# Altium PCB ESC_prototype_2.PcbDoc
Units mm, origin at the board's own origin, x right, y up, seen from the top; angles counter-clockwise.
Board outline 50 x 30 mm, 2 copper layers (Top Layer, Bottom Layer); 49 components, 41 nets, 160 pads, 60 vias.
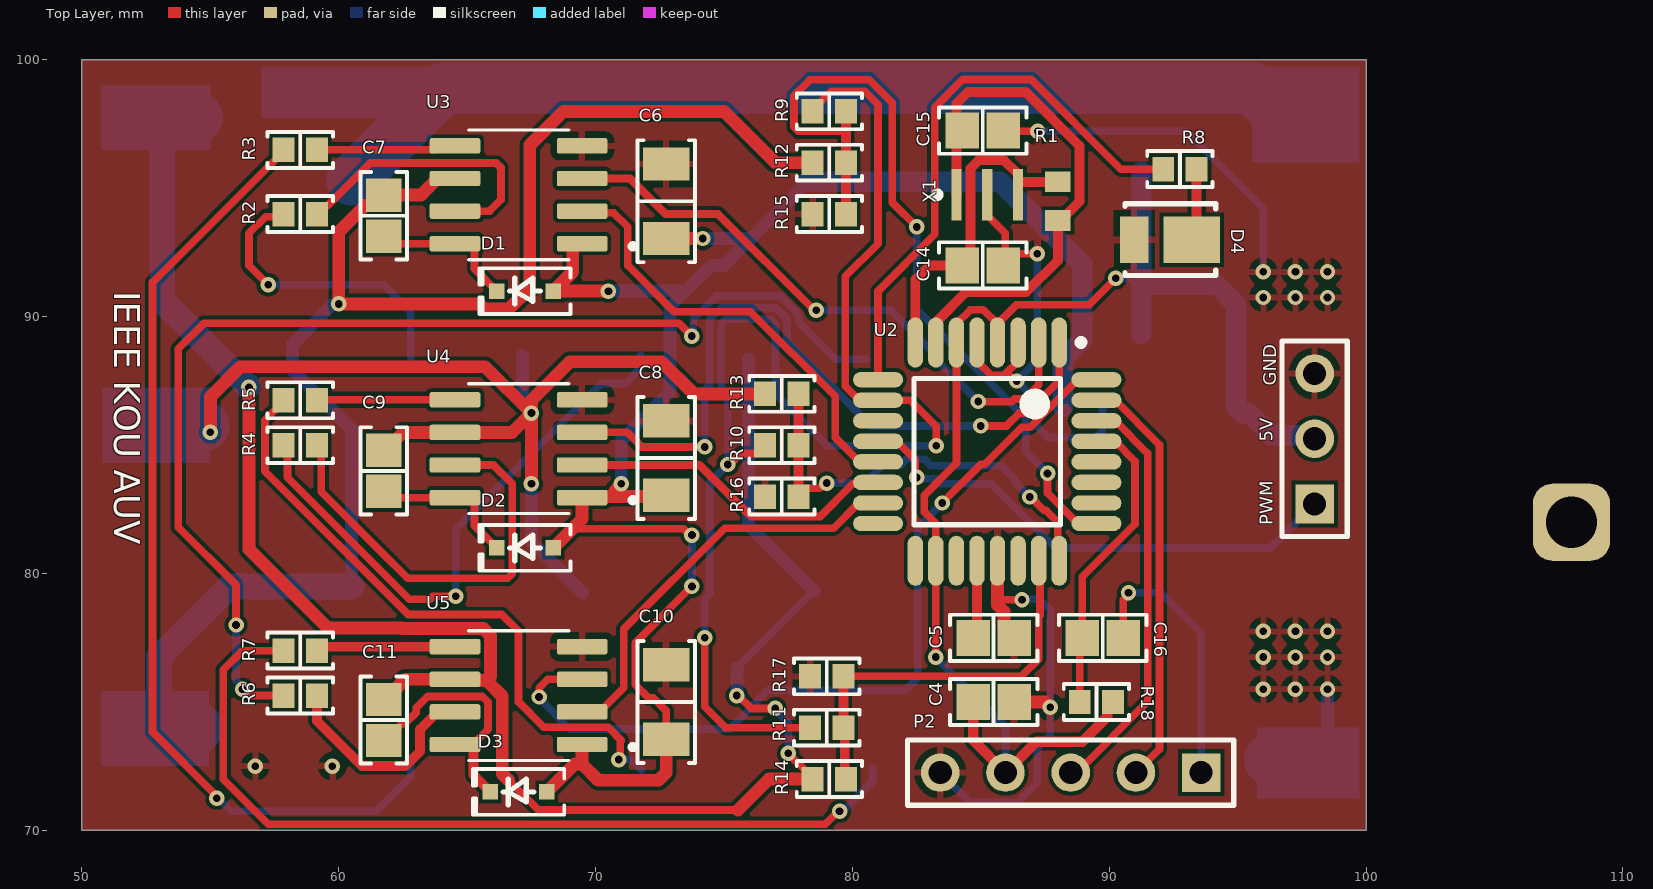
[diagram p0: Top Layer view]
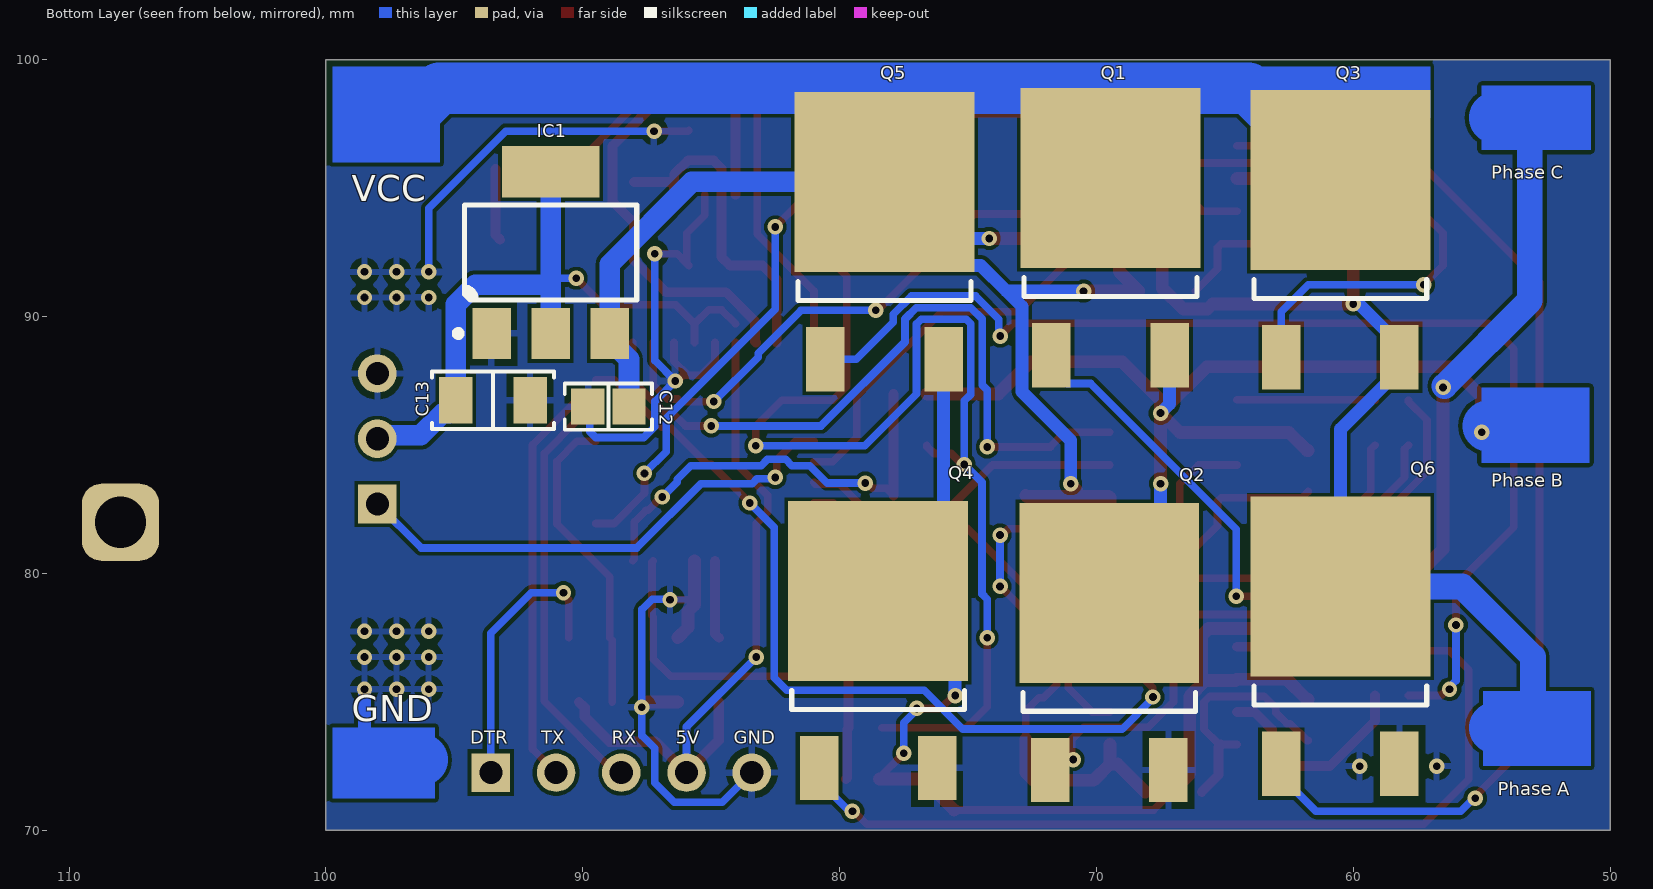
[diagram p1: Bottom Layer view, seen from below]
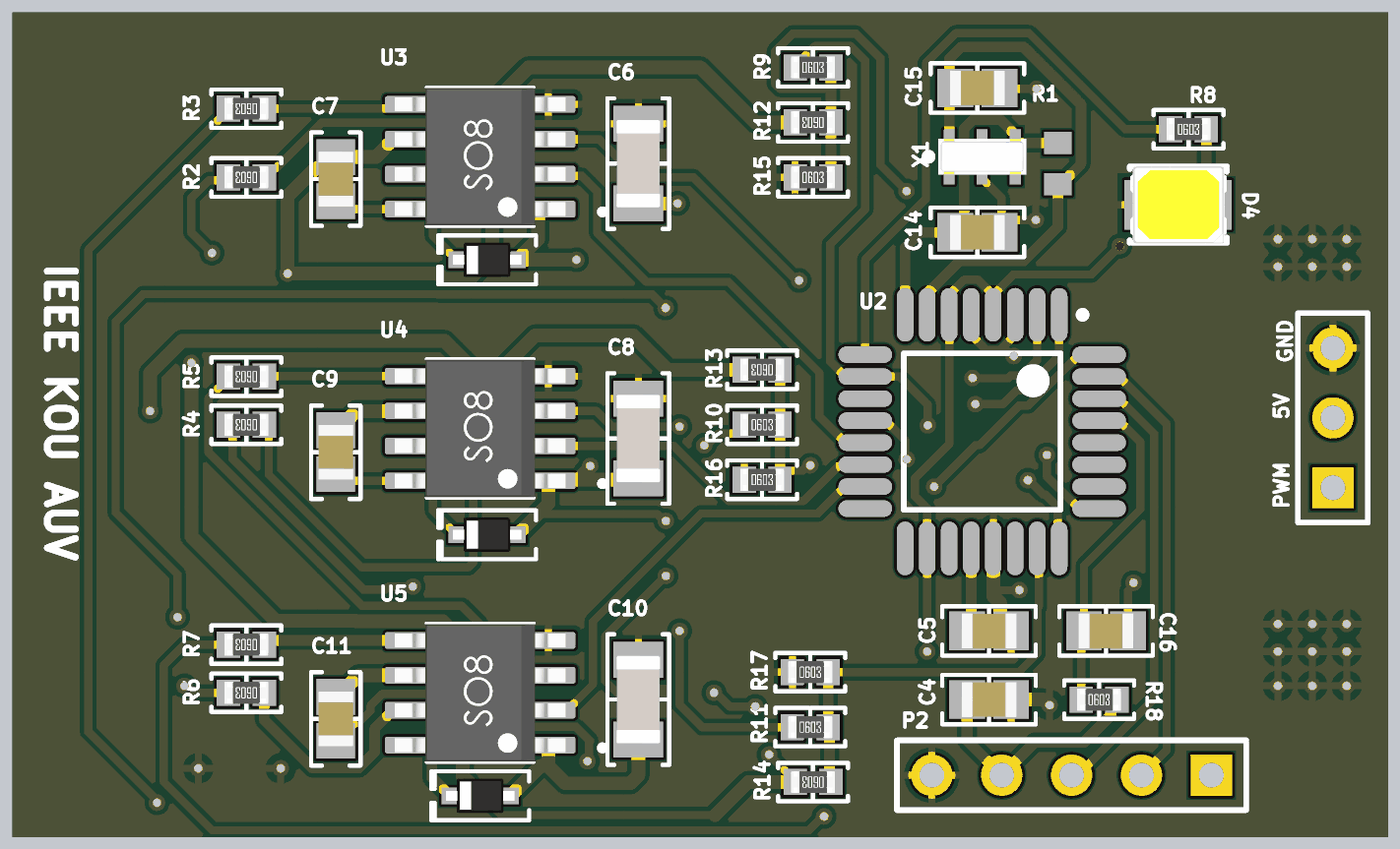
[diagram p2: 3D render of the assembled board from above, using the file's embedded part models]
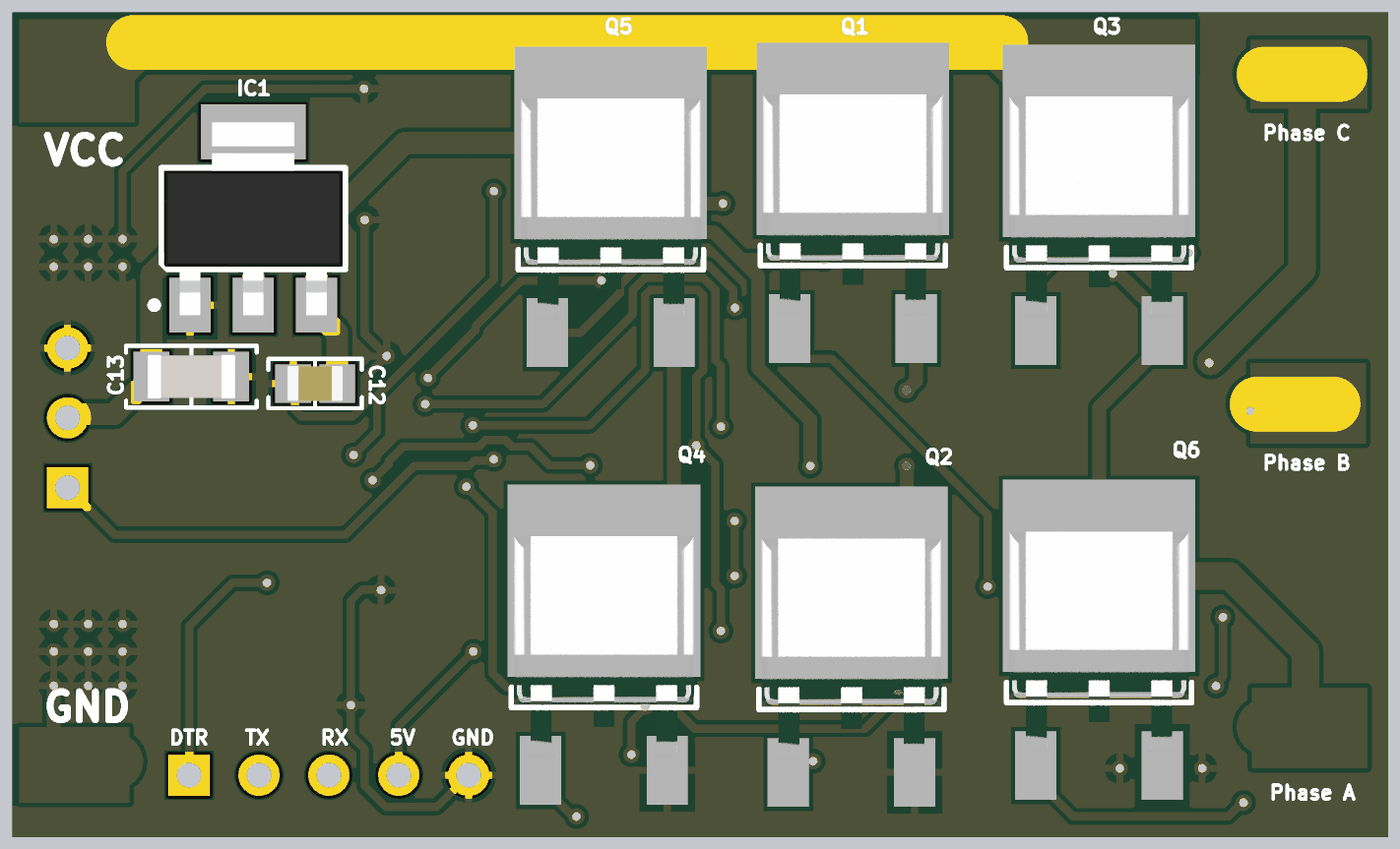
[diagram p3: 3D render of the assembled board from below, using the file's embedded part models]

## Layer stack, top to bottom
Top Solder: solder mask 0.0102, Solder Resist, Dk 3.5
Top Layer: signal copper 0.0356
Dielectric 1: dielectric 0.32, FR-4, Dk 4.8
Bottom Layer: signal copper 0.0356
Bottom Solder: solder mask 0.0102, Solder Resist, Dk 3.5

## Board outline
50,70 50,100 100,100 100,70

## Design rules (kind name [scope] priority, off if disabled: settings)
Clearance [All] p1: gap=0.254 ignorepadtopadclearanceinfootprint=FALSE except(0.152: Arc-Track Arc-SMDPad Arc-Poly Track-Track Track-SMDPad Track-Poly SMDPad-SMDPad SMDPad-THPad SMDPad-Poly THPad-Poly Via-Poly Fill-Poly Poly-Poly)
PolygonConnect [All] p1: connectstyle=Relief reliefconductorwidth=0.254 reliefentries=4 polygonreliefangle="90 Angle" airgapwidth=0.254
RoutingVias [All] p1: holewidth=0.3 width=0.6 viastyle="Through Hole" minholewidth=0.3 minwidth=0.3 maxholewidth=0.9 maxwidth=1.27
SolderMaskExpansion SolderMaskExpansion_Via [IsVia] p1: expansion=0.102 istentingtop=TRUE
SolderMaskExpansion SolderMaskExpansion_1 [All] p2: expansion=0.102 istentingtop=FALSE
Width [All] p1: maxlimit=2 minlimit=0.254 preferedwidth=0.3 minimp=50.000000 maximp=50.000000 favimp=50.000000
30 further rules are at their usual default settings.

## Components (designator, comment, footprint, x,y, rotation, side; value= is the part's Value field where it differs from the comment)
C4 "0.1 µF" "CAP 0805_2012" 85.5,75 r180 top
C5 "0.1 µF" "CAP 0805_2012" 85.5,77.5 r180 top
C6 "10 µF" "CAP 1206_3216 - 0.8MM" 72.75,94.5 r90 top
C7 "2.2 µF" "CAP 0805_2012" 61.75,93.936 r90 top
C8 "10 µF" "CAP 1206_3216 - 0.8MM" 72.75,84.5 r90 top
C9 "2.2 µF" "CAP 0805_2012" 61.75,84 r90 top
C10 "10 µF" "CAP 1206_3216 - 0.8MM" 72.75,75 r90 top
C11 "2.2 µF" "CAP 0805_2012" 61.75,74.3 r90 top
C12 "0.1 µF" "CAP 0805_2012" 89,86.5 r180 bottom
C13 "10 µF" "CAP 1206_3216 - 0.8MM" 93.5,86.75 r0 bottom
C14 "15 pF" "CAP 0805_2012" 85.075,92 r180 top
C15 "15" "CAP 0805_2012" 85.075,97.25 r180 top value="15 pF"
C16 "0.1 µF" "CAP 0805_2012" 89.75,77.5 r0 top
D1 "1N4148WS" SOD323F 67.25,91 r180 top
D2 "1N4148WS" SOD323F 67.25,81 r180 top
D3 "1N4148WS" SOD323F 67,71.5 r180 top
D4 "Led" "CREE J 2835" 92.25,93 r0 top
GND "PWM input" HDR1X3 98,82.71 r90 top (schematic designator P1)
IC1 "LD1117S50TR" "ST SOT-223" 91.25,92.5 r90 bottom
P2 "UART Pins" HDR1X5 93.58,72.25 r180 top
Q1 "IRLR7843TRPBF" FP-PG-TO252-3-MFG 69.45,93.075 r180 bottom
Q2 "IRLR7843TRPBF" FP-PG-TO252-3-MFG 69.5,76.925 r180 bottom
Q3 "IRLR7843TRPBF" FP-PG-TO252-3-MFG 60.5,93 r180 bottom
Q4 "IRLR7843TRPBF" FP-PG-TO252-3-MFG 78.5,77 r180 bottom
Q5 "IRLR7843TRPBF" FP-PG-TO252-3-MFG 78.25,92.925 r180 bottom
Q6 "IRLR7843TRPBF" FP-PG-TO252-3-MFG 60.5,77.175 r180 bottom
R1 "R10k" RESC1608X55X25ML10T15 88,94.5 r270 top
R2 "100 Ohms" "RES 0603_1608" 58.5,94 r180 top
R3 "100 Ohms" "RES 0603_1608" 58.5,96.5 r180 top
R4 "100 Ohms" "RES 0603_1608" 58.5,85 r180 top
R5 "100 Ohms" "RES 0603_1608" 58.5,86.75 r180 top
R6 "100 Ohms" "RES 0603_1608" 58.5,75.25 r180 top
R7 "100 Ohms" "RES 0603_1608" 58.5,77 r180 top
R8 "100 Ohms" "RES 0603_1608" 92.75,95.75 r0 top
R9 "33k Ohms" "RES 0603_1608" 79.1,98 r0 top
R10 "33k Ohms" "RES 0603_1608" 77.25,85 r0 top
R11 "33k Ohms" "RES 0603_1608" 79,74 r0 top
R12 "33k Ohms" "RES 0603_1608" 79.1,96 r180 top
R13 "33k Ohms" "RES 0603_1608" 77.25,87 r180 top
R14 "33k Ohms" "RES 0603_1608" 79.1,72 r180 top
R15 "10k Ohms" "RES 0603_1608" 79.1,94 r0 top
R16 "10k Ohms" "RES 0603_1608" 77.25,83 r0 top
R17 "10k Ohms" "RES 0603_1608" 79,76 r0 top
R18 "10k Ohms" "RES 0603_1608" 89.5,75 r0 top
U2 "ATmega328P-AU" 32A_M 85.25,84.75 r270 top
U3 "IR2101S" SOIC127P600X175-8N 67,94.75 r180 top
U4 "IR2101S" SOIC127P600X175-8N 67,84.864 r180 top
U5 "IR2101S" SOIC127P600X175-8N 67,75.25 r180 top
X1 "16 Mhz crystal" MURA-CSTCE_G_A-3_V 85.25,94.75 r0 top

## Footprints (in the part's own frame and the unit in brackets; to place one, negate y for a bottom-side part, rotate by r counter-clockwise, add the part's x,y. Pads: shape width x height; smd on the part's side, far side on the other; paste and mask are expansions set on the pad)
32A_M [mm] "Thin QFP, 32-Leads, Body 7x7mm, Pitch 0.8mm, IPC Low Density"
  oval 1.95x0.6 smd: 1(-4.25,2.8) 2(-4.25,2) 3(-4.25,1.2) 4(-4.25,0.4) 5(-4.25,-0.4) 6(-4.25,-1.2) 7(-4.25,-2) 8(-4.25,-2.8) 17(4.25,-2.8) 18(4.25,-2) 19(4.25,-1.2) 20(4.25,-0.4) 21(4.25,0.4) 22(4.25,1.2) 23(4.25,2) 24(4.25,2.8)
  oval 0.6x1.95 smd: 9(-2.8,-4.25) 10(-2,-4.25) 11(-1.2,-4.25) 12(-0.4,-4.25) 13(0.4,-4.25) 14(1.2,-4.25) 15(2,-4.25) 16(2.8,-4.25) 25(2.8,4.25) 26(2,4.25) 27(1.2,4.25) 28(0.4,4.25) 29(-0.4,4.25) 30(-1.2,4.25) 31(-2,4.25) 32(-2.8,4.25)
  silkscreen extent -4.37,-2.85 2.85,3.78, body extent -3.5,-3.5 3.5,3.5, height 1.2
"CAP 0805_2012" [mm] "Chip Capacitor, 2-Leads, Body 2.00x1.20mm, IPC Medium Density"
  rect 1.3x1.4 smd: 1(-0.8,0) 2(0.8,0)
  silkscreen extent -1.7,-0.9 1.7,0.9, body extent -1,-0.64 1,0.64, height 1.26
"CAP 1206_3216 - 0.8MM" [mm] "Chip Capacitor, 2-Leads, Body 3.25x1.60mm, IPC Medium Density"
  rect 1.3x1.8 smd: 1(-1.45,0) 2(1.45,0)
  silkscreen extent -2.37,-1.12 2.37,1.12, body extent -1.6,-0.8 1.6,0.8, height 0.8
"CREE J 2835" [mm] "LED, 2-Leads, Body 3.5x2.8mm, CREE JE2835AWT-00-0000-000A0ZF627E"
  rect 2.2x1.8 smd: 1(0.962,0)
  rect 1.1x1.8 smd: 2(-1.278,0)
  silkscreen extent -1.64,-1.39 1.9,1.4, body extent -1.62,-1.4 1.9,1.4, height 0.7
FP-PG-TO252-3-MFG [mm]
  rect 1.5x2.5 smd paste+0 mask+0: 1(-2.3,-4.575) 3(2.3,-4.575)
  rect 7x7 smd paste+0 mask+0: 4(0,2.325)
  silkscreen extent -3.36,-2.28 3.36,-1.55, body extent -3.27,-5.21 3.27,5.21, height 2.38
HDR1X3 [mm] "Connector; Header; 3 Position"
  rect 1.5x1.5 hole 0.9: 1(0,0)
  round 1.5 hole 0.9: 2(2.54,0) 3(5.08,0)
  silkscreen extent -1.27,-1.27 6.35,1.27
HDR1X5 [mm] "Connector; Header; 5 Position"
  rect 1.5x1.5 hole 0.9: 1(0,0)
  round 1.5 hole 0.9: 2(2.54,0) 3(5.08,0) 4(7.62,0) 5(10.16,0)
  silkscreen extent -1.27,-1.27 11.43,1.27
MURA-CSTCE_G_A-3_V [mm] "SMD, 3-Leads, Body 3.2x1.3mm, Pitch 1.2mm"
  rect 0.4x2 smd: 1(-1.2,0) 2(0,0) 3(1.2,0)
  silkscreen extent -2.07,-0.12 -1.83,0.12, body extent -1.6,-0.65 1.6,0.65, height 0.7
"RES 0603_1608" [mm] "Chip Resistor, 2-Leads, Body 1.60x0.80mm, IPC Medium Density"
  rect 0.85x0.95 smd: 1(-0.65,0) 2(0.65,0)
  silkscreen extent -1.27,-0.7 1.27,0.7, body extent -0.8,-0.4 0.8,0.4, height 0.45
RESC1608X55X25ML10T15 [mm] "Chip Resistor, 2-Leads, Body 1.60x0.80mm, IPC Low Density"
  rect 0.8x1 smd: 1(-0.75,0) 2(0.75,0)
  body extent -0.85,-0.45 0.85,0.45, height 0.55
SOD323F [mm] "SODFL, 2-Leads, Body 1.25x2.50mm, IPC Medium Density"
  rect 0.6x0.6 smd: 1(-1.1,0) 2(1.1,0)
  silkscreen extent -1.78,-0.89 1.78,0.89, body extent -1.25,-0.62 1.25,0.63, height 0.8
SOIC127P600X175-8N [mm]
  rrect25% 1.97x0.6 smd: 1(-2.475,1.905) 2(-2.475,0.635) 3(-2.475,-0.635) 4(-2.475,-1.905) 5(2.475,-1.905) 6(2.475,-0.635) 7(2.475,0.635) 8(2.475,1.905)
  silkscreen extent -4.54,-2.52 1.95,2.52, body extent -3.1,-2.5 3.1,2.5, height 1.75
"ST SOT-223" [mm] "SOT223, 4-Leads, Body 6.50x7.00mm (avg), Pitch 2.30mm, IPC Medium Density"
  rect 2x1.5 smd: 1(-3.15,2.3) 2(-3.15,0) 3(-3.15,-2.3)
  rect 2x3.8 smd: 4(3.15,0)
  silkscreen extent -3.27,-3.35 1.85,3.73, body extent -3.52,-3.25 3.5,3.25, height 1.8

## Part data
C4 C5 C12 C16: library part CL21B104KBCNNNC, "CAP CER 0.1UF 50V X7R 0805", Device Package="0805 (2012 Metric)", manufacturer="Samsung Electro-Mechanics", Operating Temperature="-55°C ~ 125°C", Supplier Part Number 1=1276-1003-1-ND, Temperature Coefficient=X7R, Tolerance=±10%, Voltage - Rated=50V, Applications="General Purpose", Capacitance="0.1 µF", componentlink1description=Datasheet, componentlink1url=http://www.samsungsem.com/kr/support/product-search/mlcc/CL21B104KBCNNNC.jsp, componentlink2description="DigiKey Link", componentlink2url=https://www.digikey.com/en/products/detail/samsung-electro-mechanics/CL21B104KBCNNNC/3886661, Lifecycle Status=Active, Minimum Order=1, Mounting Type="Surface Mount, MLCC", Package / Case="0805 (2012 Metric)", packaging=TapeAndReel, Part Number=CL21B104KBCNNNC, Part Status=Active, partid=6201, price=0.01, series=CL, Size / Dimension="0.079\" L x 0.049\" W (2.00mm x 1.25mm)", Supplier 1=DigiKey, Thickness (Max)="0.037\" (0.95mm)"
  C4 C5: lastupdated="3/11/2022 5:29:47 AM"
  C12 C16: lastupdated="3/17/2022 8:29:34 AM"
C6 C8 C10 C13: library part CL31A106KACLNNC, "CAP CER 10UF 25V X5R 1206", Device Package="1206 (3216 Metric)", manufacturer="Samsung Electro-Mechanics", Operating Temperature="-55°C ~ 85°C", Supplier Part Number 1=1276-2720-1-ND, Temperature Coefficient=X5R, Tolerance=±10%, Voltage - Rated=25V, Applications="General Purpose", Capacitance="10 µF", componentlink1description=Datasheet, componentlink1url=http://www.samsungsem.com/kr/support/product-search/mlcc/CL31A106KACLNNC.jsp, componentlink2description="DigiKey Link", componentlink2url=https://www.digikey.com/en/products/detail/samsung-electro-mechanics/CL31A106KACLNNC/3888378, Features="Low Profile", lastupdated="3/11/2022 5:31:45 AM", Lifecycle Status=Active, Minimum Order=1, Mounting Type="Surface Mount, MLCC", Package / Case="1206 (3216 Metric)", packaging=TapeAndReel, Part Number=CL31A106KACLNNC, Part Status=Active, partid=20311, price=0.04, series=CL, Size / Dimension="0.126\" L x 0.063\" W (3.20mm x 1.60mm)", Supplier 1=DigiKey, Thickness (Max)="0.037\" (0.95mm)"
C7 C9 C11: library part CL21A225KBFNNNE, "CAP CER 2.2UF 50V X5R 0805", Device Package="0805 (2012 Metric)", manufacturer="Samsung Electro-Mechanics", Operating Temperature="-55°C ~ 85°C", Supplier Part Number 1=1276-6702-1-ND, Temperature Coefficient=X5R, Tolerance=±10%, Voltage - Rated=50V, Applications="General Purpose", Capacitance="2.2 µF", componentlink1description=Datasheet, componentlink1url=http://www.samsungsem.com/kr/support/product-search/mlcc/CL21A225KBFNNNE.jsp, componentlink2description="DigiKey Link", componentlink2url=https://www.digikey.com/en/products/detail/samsung-electro-mechanics/CL21A225KBFNNNE/5961186, lastupdated="3/11/2022 5:29:51 AM", Lifecycle Status=Active, Minimum Order=1, Mounting Type="Surface Mount, MLCC", Package / Case="0805 (2012 Metric)", packaging=TapeAndReel, Part Number=CL21A225KBFNNNE, Part Status=Active, partid=4762, price=0.04, series=CL, Size / Dimension="0.079\" L x 0.049\" W (2.00mm x 1.25mm)", Supplier 1=DigiKey, Thickness (Max)="0.053\" (1.35mm)"
C14: library part CL21C101JB61PNC, "CAP CER 100PF 50V C0G/NP0 0805", Device Package="0805 (2012 Metric)", manufacturer="Samsung Electro-Mechanics", Operating Temperature="-55°C ~ 125°C", Ratings=AEC-Q200, Supplier Part Number 1=1276-2567-1-ND, Temperature Coefficient="C0G, NP0", Tolerance=±5%, Voltage - Rated=50V, Applications=Automotive, Capacitance="15 pF", componentlink1description=Datasheet, componentlink1url=http://www.samsungsem.com/kr/support/product-search/mlcc/CL21C101JB61PNC.jsp, componentlink2description="DigiKey Link", componentlink2url=https://www.digikey.com/en/products/detail/samsung-electro-mechanics/CL21C101JB61PNC/3888225, lastupdated="3/17/2022 8:29:31 AM", Lifecycle Status=Active, Minimum Order=1, Mounting Type="Surface Mount, MLCC", Package / Case="0805 (2012 Metric)", packaging=TapeAndReel, Part Number=CL21C101JB61PNC, Part Status=Active, partid=7790, price=0.02, series=CL, Size / Dimension="0.079\" L x 0.049\" W (2.00mm x 1.25mm)", Supplier 1=DigiKey, Thickness (Max)="0.028\" (0.70mm)"
C15: library part CL21C101JB61PNC, "CAP CER 100PF 50V C0G/NP0 0805", Capacitance="15 pF", Device Package="0805 (2012 Metric)", manufacturer="Samsung Electro-Mechanics", Operating Temperature="-55°C ~ 125°C", Ratings=AEC-Q200, Supplier Part Number 1=1276-2567-1-ND, Temperature Coefficient="C0G, NP0", Tolerance=±5%, Voltage - Rated=50V, Applications=Automotive, componentlink1description=Datasheet, componentlink1url=http://www.samsungsem.com/kr/support/product-search/mlcc/CL21C101JB61PNC.jsp, componentlink2description="DigiKey Link", componentlink2url=https://www.digikey.com/en/products/detail/samsung-electro-mechanics/CL21C101JB61PNC/3888225, lastupdated="3/17/2022 8:29:31 AM", Lifecycle Status=Active, Minimum Order=1, Mounting Type="Surface Mount, MLCC", Package / Case="0805 (2012 Metric)", packaging=TapeAndReel, Part Number=CL21C101JB61PNC, Part Status=Active, partid=7790, price=0.02, series=CL, Size / Dimension="0.079\" L x 0.049\" W (2.00mm x 1.25mm)", Supplier 1=DigiKey, Thickness (Max)="0.028\" (0.70mm)"
D1 D2 D3: "DIODE GEN PURP 75V 150MA SOD323F", Current - Average Rectified (Io)=150mA, Current - Reverse Leakage @ Vr="5µA @ 75V", manufacturer="ON Semiconductor", Operating Temperature - Junction="150°C (Max)", Package / Case="SC-90, SOD-323F", Supplier Device Package=SOD-323F, Supplier Part Number 1=1N4148WSFSCT-ND, Voltage - DC Reverse (Vr) (Max)=75V, Voltage - Forward (Vf) (Max) @ If="1V @ 10mA", componentlink1description=Datasheet, componentlink1url=https://www.onsemi.com/pub/Collateral/1N914BWS-D.pdf, componentlink2description="DigiKey Link", componentlink2url=http://digikey.com/product-detail/en/on-semiconductor/1N4148WS/1N4148WSFSCT-ND/1873821, Diode Type=Standard, lastupdated="3/11/2022 6:04:11 AM", Lifecycle Status=Active, Minimum Order=1, Mounting Type="Surface Mount", packaging=TapeAndReel, Part Number=1N4148WS, Part Status=Active, partid=1158, price=0.03, Reverse Recovery Time (trr)=4ns, series=-, Speed="Small Signal =< 200mA (Io), Any Speed", Supplier 1=DigiKey
D4: library part JE2835AWT-R-H30GA0000-N0000001, "LED WHITE  3000K JE2835 3V", CRI (Color Rendering Index)=80, Current - Max=240mA, Current - Test=150mA, Device Package="1113 (2835 Metric)", Flux @ 25°C, Current - Test="70lm (Typ)", Flux @ 85°C, Current - Test="60lm (Typ)", Lumens/Watt @ Current - Test="158 lm/W", manufacturer="Cree Inc.", Supplier Device Package=SMD, Supplier Part Number 1=2138-JE2835AWT-R-H30GA0000-N0000001CT-ND, Voltage - Forward (Vf) (Typ)=2.95V, CCT (K)="3000K 3-Step MacAdam Ellipse", componentlink1description=Datasheet, componentlink1url=https://www.cree.com/led-components/media/documents/data-sheet-JSeries-2835-3v.pdf, componentlink2description="DigiKey Link", componentlink2url=http://digikey.com/product-detail/en/cree-inc/JE2835AWT-R-H30GA0000-N0000001/2138-JE2835AWT-R-H30GA0000-N0000001CT-ND/10820199, lastupdated="3/11/2022 6:21:18 AM", Lifecycle Status=Active, Minimum Order=1, Mounting Type="Surface Mount", Package / Case="1113 (2835 Metric)", packaging=TapeAndReel, Part Number=JE2835AWT-R-H30GA0000-N0000001, Part Status="1113 (2835 Metric)", partid=60, price=0.01, series=J, Supplier 1=DigiKey, Viewing Angle=120°
GND: library part "Header 3", "Header, 3-Pin", LatestRevisionDate=17-Jul-2002, LatestRevisionNote="Re-released for DXP Platform.", Publisher="Altium Limited"
IC1: "IC REG LINEAR 5V 800MA SOT223", Current - Output=800mA, Current - Quiescent (Iq)=10mA, manufacturer=STMicroelectronics, Package / Case="TO-261-4, TO-261AA", Supplier Device Package=SOT-223, Supplier Part Number 1=497-6447-1-ND, Voltage - Input (Max)=15V, Voltage - Output (Min/Fixed)=5V, Voltage Dropout (Max)="1.2V @ 800mA", componentlink1description=Datasheet, componentlink1url=http://www.st.com/content/ccc/resource/technical/document/datasheet/99/3b/7d/91/91/51/4b/be/CD00000544.pdf/files/CD00000544.pdf/jcr:content/translations/en.CD00000544.pdf, componentlink2description="DigiKey Link", componentlink2url=http://digikey.com/product-detail/en/stmicroelectronics/LD1117S50TR/497-6447-1-ND/1865475, lastupdated="3/17/2022 9:08:52 AM", Lifecycle Status=Active, Minimum Order=1, Mounting Type="Surface Mount", Number of Regulators=1, Output Configuration=Positive, Output Type=Fixed, packaging=TapeAndReel, Part Number=LD1117S50TR, Part Status=Active, price=0.14, Protection Features="Over Current, Over Temperature", PSRR="75dB (120Hz)", series=-, Supplier 1=DigiKey
P2: library part "Header 5", "Header, 5-Pin", LatestRevisionDate=17-Jul-2002, LatestRevisionNote="Re-released for DXP Platform.", Publisher="Altium Limited"
Q1 Q2 Q3 Q4 Q5 Q6: library part CMP-32901-000143-1, "MOSFET N-CH 30V 161A DPAK", Continuous Drain Current=161A, Drain To Source Breakdown Voltage=30V, Drain To Source Resistance=3.2mΩ, Gate To Source Voltage=20V, Input Capacitace At Vds="4380pF @ 15V", manufacturer=Infineon, Max Forward Diode Voltage=1V, Max Junction Temp=+175°C, Package=PG-TO252-3, Power Dissipation=140W, Pulse Drain Current=620A, Temperature="-55°C to +175°C", Temperature Range Low=-55°C, Automotive=No, Category=Trans, componentlink2description=Datasheet, componentlink2url=https://www.infineon.com/dgdl/irlr7843pbf.pdf?fileId=5546d462533600a40153566de53526d8, Depletion Mode=False, Device Class L1="Discrete Semiconductors", Device Class L2=Transistors, Device Class L3=MOSFETs, Digikey Description="MOSFET N-CH 30V 161A DPAK", Drain To Source Voltage=30V, Footprint Url=https://www.infineon.com/cms/en/product/packages/PG-TO252/PG-TO252-3-901/, Gate Charge At Vgs="34nC @ 4.5V", Height=2.52mm, Lead Free=Yes, Manufacturer Part Number=IRLR7843TRPBF, Number Of Channels=1, Number Of N Channels=1, Octopart=https://octopart.com/irlr7843trpbf-infineon-65875062, Reverse Recovery Charge=36nC, Reverse Recovery Time=39ns, RoHS=TRUE, Rthja Max=50°C/W, Temperature Range High=+175°C, Threshold Vgs Max=2.3V, Threshold Vgs Min=1.4V, Turn Off Delay Time=34ns, Turn On Delay Time=25ns
R1: library part CMP-2100-03667-1, "Chip Resistor, 0 Ohm, +/- 5%, 0.1 W, -55 to 155 degC, 0603 (1608 Metric), RoHS, Tape and Reel", Case Code (Imperial)=0603, Case Code (Metric)=1608, manufacturer=Yageo, Max Operating Temperature=155degC, Min Operating Temperature=-55degC, Package Description="2-Pin Surface Mount Device, Body 1.6 x 0.8 mm", Package Quantity=5000, Power Rating=100mW, Resistance=0mOhm, Temperature Coefficient=200ppm/degreesC, Tolerance=5%, Voltage Rating=50V, Case/Package=0603, Composition=ThickFilm, Contact Plating=Tin, Datasheet URL=http://www.yageo.com/NewPortal/yageodocoutput?fileName=/pdf/R-Chip/PYu-RC_Group_51_RoHS_L_5.pdf, Datasheet Version="Rev. 5, 10/2016", Depth=0.8mm, Height=0.45mm, Lead Free=LeadFree, Length=1.6mm, Manufacturer URL=http://www.yageo.com/, Military Standard=Not, Number of Pins=2, Package Reference=0603, packaging=TapeandReel, Radiation Hardening=No, REACH SVHC=NoSVHC, RoHSCompliant=true, Termination=SMD/SMT, Voltage Rating (DC)=50V, Width=0.8mm
R2 R3 R4 R5 R6 R7 R8: library part RNCS0603BKE100R, "RES 100 OHM 0.1% 1/16W 0603", Device Package="0603 (1608 Metric)", manufacturer="Stackpole Electronics Inc", Operating Temperature="-55°C ~ 155°C", Power (Watts)="0.063W, 1/16W", Ratings=AEC-Q200, Supplier Device Package=0603, Supplier Part Number 1=RNCS0603BKE100RCT-ND, Temperature Coefficient=±25ppm/°C, Tolerance=±0.1%, componentlink1description=Datasheet, componentlink1url=https://www.seielect.com/catalog/sei-rncs_rnch.pdf, componentlink2description="DigiKey Link", componentlink2url=https://www.digikey.com/en/products/detail/stackpole-electronics-inc/RNCS0603BKE100R/1799988, Composition="Thin Film", Features="Anti-Corrosive, Automotive AEC-Q200, Moisture Resistant", Height - Seated (Max)="0.022\" (0.55mm)", lastupdated="3/11/2022 5:45:14 AM", Lifecycle Status=Active, Minimum Order=1, Number of Terminations=2, Package / Case="0603 (1608 Metric)", packaging=TapeAndReel, Part Number=RNCS0603BKE100R, Part Status=Active, partid=4839, price=0.08, Resistance="100 Ohms", series=RNCS, Size / Dimension="0.061\" L x 0.031\" W (1.55mm x 0.80mm)", Supplier 1=DigiKey
R9 R10 R11 R12 R13 R14 R15 R16 R17 R18: library part RNCS0603BKE100R, "RES 100 OHM 0.1% 1/16W 0603", Device Package="0603 (1608 Metric)", manufacturer="Stackpole Electronics Inc", Operating Temperature="-55°C ~ 155°C", Power (Watts)="0.063W, 1/16W", Ratings=AEC-Q200, Resistance="100 Ohms", Supplier Device Package=0603, Supplier Part Number 1=RNCS0603BKE100RCT-ND, Temperature Coefficient=±25ppm/°C, Tolerance=±0.1%, componentlink1description=Datasheet, componentlink1url=https://www.seielect.com/catalog/sei-rncs_rnch.pdf, componentlink2description="DigiKey Link", componentlink2url=https://www.digikey.com/en/products/detail/stackpole-electronics-inc/RNCS0603BKE100R/1799988, Composition="Thin Film", Features="Anti-Corrosive, Automotive AEC-Q200, Moisture Resistant", Height - Seated (Max)="0.022\" (0.55mm)", lastupdated="3/11/2022 5:45:14 AM", Lifecycle Status=Active, Minimum Order=1, Number of Terminations=2, Package / Case="0603 (1608 Metric)", packaging=TapeAndReel, Part Number=RNCS0603BKE100R, Part Status=Active, partid=4839, price=0.08, series=RNCS, Size / Dimension="0.061\" L x 0.031\" W (1.55mm x 0.80mm)", Supplier 1=DigiKey
U2: library part CMP-0095-00269-2, "8-bit AVR Microcontroller, 32KB Flash, 1KB EEPROM, 2KB SRAM, 32-pin TQFP, Industrial Grade (-40°C to 85°C)", Code_JEDEC=MS-026-ABA, componentlink1description="Manufacturer URL", componentlink1url=http://www.atmel.com/, componentlink2description="ATmega48A/48PA/88A/88PA/168A/168PA/328/328P Datasheet", componentlink2url=http://www.atmel.com/dyn/resources/prod_documents/doc8271.pdf, ComponentLink3Description="ATmega48A/48PA/88A/88PA/168A/168PA/328/328P Summary", ComponentLink3URL=http://www.atmel.com/dyn/resources/prod_documents/8271S.pdf, DatasheetVersion="revD, May-2011", PackageDescription="32-Lead, 7x7x1.0 mm Body, 0.8mm Lead Pitch, Thin Profile Plastic Quad Flat Package (TQFP)", PackageReference=32A, PackageVersion="revC, Oct-2010", RevisionNote="DatasheetVersion & PackageVersion updated. URLs added."
U3 U4 U5: "Half-Bridge Gate Driver IC Non-Inverting 8-SOIC", Package="SOIC-8 Infineon", Availability=Unavailable, MF="Infineon Technologies", MP=IR2101S, price=None, SnapEDA_Link=https://www.snapeda.com/parts/IR2101S/Infineon%20Technologies/view-part/589975/?ref=snap
X1: library part CMP-2100-03620-1, "Ceramic Resonator, 8 MHz, +/- 0.5%, -20 to 80 degC, 3-Pin SMD, RoHS, Tape and Reel", Capacitance=33pF, Case/Package=Ceramic, Frequency=8MHz, Frequency Stability=0.2%, Frequency Tolerance=0.5%, manufacturer=Murata, Max Operating Temperature=80degC, Min Operating Temperature=-20degC, Package Description="3-Pin Surface Mount Device, Body 3.2 x 1.3 mm, Pitch 1.2 mm", Package Quantity=1, Package Reference=CSTCE_G_A-3, Composition=Ceramic, Contact Plating=Gold, Datasheet URL=http://www.murata.com/~/media/webrenewal/support/library/catalog/products/timingdevice/ceralock/p16e.ashx, Datasheet Version=42339.0, Height=0.031inch, Lead Free=LeadFree, Length=0.126inch, Load Capacitance=33pF, Manufacturer URL=http://www.murata.com/, Mount=SurfaceMount, Number of Pins=3, packaging=TapeandReel, REACH SVHC=NoSVHC, RoHSCompliant=True, Self Resonant Frequency=8MHz, Termination=SMD/SMT, Tolerance=0.5%, Width=0.051inch

## Free pads (board coordinates)
  rrect50% 3x3 hole 2: 4(108,82)

## Via types
v1: diameter 0.6, hole 0.3, Top Layer to Bottom Layer, tented both sides, 60 vias

## Nets (pads, with @x,y where several pads share a name; then routed paths per layer and width w, separated by ;. In a path a pad name is that pad's centre, name@x,y a point inside that pad or via, vN(x,y) a via of type N, cw(c..) or ccw(c..) an arc to the next point about the centre after c; other vN are vias at no path point)
+5: C4.2 C13.2 GND.2 IC1.2 IC1.4 P2.4 R18.2 U2.4 U2.6 U2.18 | length 55.2
  Top Layer w0.3: v1(83.25,76.75) U2.18 83.25,81.951 82.798,82.403 82.798,83.04 84.05,84.292 U2.6 ; U2.6@84.05,89.726 84.601,90.277 85.099,90.277 U2.4@85.65,89.726 ; v1(90.25,91.5) 89.215,90.465 86.389,90.465 U2.4@85.65,89.726 ; U2.4@85.65,89.726 U2.4 U2.4@85.65,89.726
  Top Layer w0.4: C4.2 84.7,73.51 P2.4 87.164,73.454 88.954,73.454 89.925,74.425 89.925,74.775 R18.2
  Bottom Layer w0.3: v1(83.25,76.75) 85.96,74.04 P2.4 ; v1(90.25,91.5) 91,91.5 91.25,91.25
  Bottom Layer w0.8: IC1.2 91.25,91.25 ; IC1.4 91.25,91.25 ; GND.2 97.866,85.384 96.316,85.384 95.45,86.25 95.2,86.25 94.95,86.5 C13.2 94.95,90.481 94.181,91.25 91.25,91.25
A0: R11.2 R14.1 R17.2 U2.23 | length 15.8
  Top Layer w0.3: R17.2 83.251,76 83.253,76.002 86.579,76.002 87.252,76.675 87.252,78.325 87.307,78.38 87.307,80.443 U2.23
  Top Layer w0.381: R17.2 R11.2 79.7,73.95 79.7,72.05 R14.1
A1: R10.2 R13.1 R16.2 U2.24 | length 17.3
  Top Layer w0.3: R16.2 77.9,83.05 78.175,83.325 78.719,83.325 78.919,83.525 v1(79,83.525) ; v1(86.91,82.982) 86.938,82.982 87.455,82.465 87.535,82.465 87.994,82.006 87.994,80.556 U2.24
  Top Layer w0.381: R16.2@77.9,83.05 R10.2 R13.1
  Bottom Layer w0.3: v1(79,83.525) 80.484,83.525 81.163,84.204 81.857,84.204 82.101,84.448 82.806,84.448 83.05,84.204 85.796,84.204 86.325,83.675 86.325,83.567 v1(86.91,82.982)
A2: R9.2 R12.1 R15.2 U2.25 | length 31.9
  Top Layer w0.3: 79.75,97.25 79.723,97.223 77.9,97.223 77.723,97.4 77.723,98.6 78.352,99.229 80.66,99.229 81.551,98.338 81.551,94.449 v1(82.5,93.5) ; v1(87.6,83.9) 87.6,83.124 88.774,81.95 U2.25
  Top Layer w0.381: R15.2 79.75,97.25 R9.2
  Bottom Layer w0.3: v1(82.5,93.5) 82.5,90.3 86.75,86.05 86.75,84.75 v1(87.6,83.9)
AHigh: U2.13 U3.2 | length 17.4
  Top Layer w0.3: U3.2 69.534,94.056 70.694,94.056 71.25,93.5 71.25,92 73.052,90.198 76.029,90.198 79.326,86.901 79.326,85.298 80.274,84.35 U2.13
ALow: U2.2 U3.3 | length 23.4
  Top Layer w0.3: U3.3 71.338,95.385 72.721,94.002 74.761,94.002 78.513,90.25 v1(78.594,90.25) ; v1(84.9,86.7) 84.907,86.693 86.193,86.693 86.296,86.796 86.692,86.796 87.25,87.354 U2.2
  Bottom Layer w0.3: v1(78.594,90.25) 81.5,90.25 83.171,88.579 83.171,88.429 v1(84.9,86.7)
BHigh: U2.14 U4.2 | length 12.9
  Top Layer w0.3: U4.2 74.044,84.229 76.05,82.223 78.74,82.223 80.01,83.493 80.943,83.493 U2.14
BLow: U2.1 U4.3 | length 28.5
  Top Layer w0.3: U4.3 71.224,85.499 71.79,84.933 v1(74.25,84.933) ; v1(85,85.75) 86,85.75 86.5,86.25 86.785,86.25 88.05,87.515 U2.1
  Bottom Layer w0.3: v1(74.25,84.933) 74.25,87.149 74.446,87.345 74.446,89.912 74.888,90.354 77.012,90.354 77.454,89.912 77.454,89.019 80.723,85.75 v1(85,85.75)
CHigh: U2.15 U5.2 | length 16.2
  Top Layer w0.3: U5.2 70.16,74.615 71.096,75.551 71.096,77.842 75.025,81.771 79.271,81.771 80.25,82.75 U2.15
CLow: U2.32 U5.3 | length 33.5
  Top Layer w0.3: v1(67.8,75.196) 67.807,75.204 67.807,75.557 68.135,75.885 U5.3 ; v1(83.502,82.748) 83.502,82.752 85.006,84.256 85.145,84.256 86.593,85.704 86.928,85.704 88.774,87.55 U2.32
  Bottom Layer w0.3: v1(67.8,75.196) 67.8,75.146 69,73.946 75.2,73.946 76.708,75.454 82.056,75.454 82.546,75.944 82.546,81.796 83.498,82.748 v1(83.502,82.748)
D6: R9.1 R10.1 R11.1 U2.10 | length 53.2
  Top Layer w0.3: v1(74.25,77.5) 74.25,74.811 75.061,74 R11.1 ; v1(75.146,84.25) 75.227,84.25 75.652,84.675 76.325,84.675 76.6,84.95 R10.1 ; R9.1 78.45,98.05 79.177,98.777 80.473,98.777 81,98.25 81,92.85 79.723,91.573 79.723,87.301 80.274,86.75 U2.10 82.25,86.75 83.269,85.731 v1(83.269,84.979)
  Bottom Layer w0.3: v1(74.25,77.5) 74.25,79.004 74.454,79.208 74.454,83.558 v1(75.146,84.25) 75.146,86.727 74.898,86.975 74.898,89.725 75.075,89.902 76.825,89.902 77.002,89.725 77.002,87.002 79.026,84.979 v1(83.269,84.979)
DTR: C16.2 P2.1 | length 10.7
  Top Layer w0.3: C16.2 90.55,78.969 90.75,79.169 v1(90.75,79.25)
  Bottom Layer w0.3: v1(90.75,79.25) 92,79.25 93.58,77.67 P2.1
GND: C4.1 C5.1 C6.2 C8.2 C10.2 C12.1 C13.1 C14.1 C15.1 D4.2 GND.3 IC1.1 P2.5 Q2.3 Q4.3 Q6.3 R15.1 R16.1 R17.1 U2.3 U2.5 U2.21 U3.4 U4.4 U5.4 X1.2 | length 57.6
  Top Layer w0.3: U2.5 84.85,88.274 85.401,87.723 85.899,87.723 ; X1.2 85.25,93.95 85.95,93.25 C14.1@85.95,92.075 ; 85.65,78.775 85.853,78.978 86.596,78.978 v1(86.603,78.985) ; C14.1 C14.1@85.95,92.075 ; C15.1 85.902,97.224 v1(87.224,97.224) ; v1(86.4,87.5) 86.319,87.5 86.096,87.723 85.899,87.723 ; U2.3 86.45,88.274 85.899,87.723 ; v1(87.2,92.45) 86.326,92.45 C14.1@85.95,92.075
  Top Layer w0.5: U2.21 85.65,78.775 85.9,78.525 85.9,77.9 C5.1 ; C4.1 87.473,75 87.673,74.8 v1(87.7,74.8)
  Bottom Layer w0.3: P2.5 84.574,71.096 86.438,71.096 87.2,71.858 87.2,73.2 87.7,73.7 v1(87.7,74.8) 87.7,78.6 87.3,79 86.618,79 v1(86.603,78.985) ; v1(87.2,92.45) 87.2,88.3 v1(86.4,87.5) 87.202,86.698 87.202,85.721 87.623,85.3 89.5,85.3 89.726,85.526 89.726,86.426 C12.1 ; v1(87.224,97.224) 93.004,97.224 96,94.227 v1(96,91.75)
  Bottom Layer w0.5: v1(98.5,75.5) 98.5,73 98.75,72.75
  Bottom Layer w2: 96.25,72.75 98.75,72.75
  other v1: 56.75,72.5 59.75,72.5 96,75.5 97.25,75.5 96,76.75 97.25,76.75 98.5,76.75 96,77.75 97.25,77.75 98.5,77.75 96,90.75 97.25,90.75 98.5,90.75 97.25,91.75 98.5,91.75
Led_0: R8.1 U2.9 | length 22.3
  Top Layer w0.3: U2.9 81,91.004 83.204,93.208 83.204,98.151 84.296,99.243 86.954,99.243 90.447,95.75 R8.1
NetC5_2: C5.2 U2.20 | length 3.1
  Top Layer w0.381: C5.2 84.85,77.65 U2.20
NetC7_1: C7.1 D1.2 U3.8 | length 5.8
  Top Layer w0.3: C7.1 62.041,92.845 U3.8 65.135,92.845 65.285,92.695 65.285,91.865 D1.2
NetC9_1: C9.1 D2.2 U4.8 | length 5.9
  Top Layer w0.3: C9.1 61.991,82.959 U4.8 65.135,82.959 65.285,82.809 65.285,81.865 D2.2
NetC11_1: C11.1 D3.2 U5.8 | length 9.7
  Top Layer w0.3: C11.1 61.8,73.5 62.448,74.148 62.575,74.148 63.017,74.59 63.017,74.775 63.459,75.217 65.591,75.217 65.812,74.996 65.812,73.947 65.21,73.345 65.135,73.345 U5.8
  Top Layer w0.381: U5.8@65.135,73.345 65.245,73.236 65.245,72.155 D3.2
NetC16_1: C16.1 R18.1 U2.29 | length 12.1
  Top Layer w0.3: R18.1 88.85,77.4 C16.1 88.95,79.874 91,81.924 91,84.376 90.226,85.15 U2.29
NetD4_1: D4.1 R8.2 | length 2.8
  Top Layer w0.381: D4.1 93.4,93.187 R8.2
NetQ1_1: Q1.1 R4.2 | length 22.8
  Top Layer w0.3: R4.2 57.999,84.851 57.999,83.751 62.75,79 63.555,79 63.668,79.113 v1(64.554,79.113)
  Bottom Layer w0.3: v1(64.554,79.113) 64.554,81.731 70.223,87.4 71.15,87.4 71.75,88 Q1.1
NetQ2_1: Q2.1 R5.2 | length 24.7
  Top Layer w0.3: R5.2 57.85,86.7 57.123,85.973 57.123,83.988 62.702,78.409 66.341,78.409 67,77.75 67,75 67.987,74.013 70.487,74.013 71,73.5 70.957,73.457 70.957,72.815 v1(70.899,72.758)
  Bottom Layer w0.3: v1(70.899,72.758) 71.392,72.758 Q2.1
NetQ3_1: Q3.1 R2.2 | length 11.7
  Top Layer w0.3: v1(57.25,91.25) 56.5,92 56.5,93.25 57.151,93.901 57.751,93.901 R2.2
  Bottom Layer w0.3: v1(57.25,91.25) 61.75,91.25 62.8,90.2 Q3.1
NetQ4_1: Q4.1 R7.2 | length 34.1
  Top Layer w0.3: R7.2 56.25,77 55.5,76.25 55.5,72 57.254,70.246 78.943,70.246 79.447,70.75 v1(79.5,70.75)
  Bottom Layer w0.3: v1(79.5,70.75) 79.557,70.807 79.682,70.807 80.8,71.925 Q4.1
NetQ5_1: Q5.1 R6.2 | length 45.6
  Top Layer w0.3: v1(56,78) 56,79.557 53.75,81.807 53.75,88.75 54.75,89.75 65.451,89.75 65.455,89.746 73.246,89.746 v1(73.742,89.25) ; v1(56.25,75.5) 56.331,75.5 56.581,75.25 R6.2
  Bottom Layer w0.3: v1(56,78) 56,75.826 56.25,75.576 v1(56.25,75.5) ; v1(73.742,89.25) 73.799,89.307 73.799,89.905 74.7,90.806 77.2,90.806 77.906,90.1 77.906,89.794 79.35,88.35 Q5.1
NetQ6_1: Q6.1 R3.2 | length 37.2
  Top Layer w0.3: v1(55.25,71.25) 55.25,71.331 52.75,73.831 52.75,91.35 57.85,96.45 R3.2
  Bottom Layer w0.3: v1(55.25,71.25) 55.311,71.25 55.811,70.75 61.45,70.75 62.8,72.1 Q6.1
NetR2_1: R2.1 U3.7 | length 11.3
  Top Layer w0.3: R2.1 59.15,94.05 59.425,94.325 59.561,94.325 61.223,95.987 66.137,95.987 66.313,95.811 66.313,94.563 65.865,94.115 U3.7
NetR3_1: R3.1 U3.5 | length 5.4
  Top Layer w0.3: R3.1 63.685,96.5 63.84,96.655 U3.5
NetR4_1: R4.1 U4.7 | length 16.8
  Top Layer w0.3: R4.1 59.314,84.836 59.314,83.186 61.626,80.874 62.683,79.817 66.576,79.817 66.752,79.993 66.752,83.498 66.021,84.229 U4.7
NetR5_1: R5.1 U4.5 | length 5.4
  Top Layer w0.3: R5.1 59.169,86.769 U4.5
NetR6_1: R6.1 U5.7 | length 8.5
  Top Layer w0.381: R6.1 59.15,74.266 60.908,72.507 62.592,72.507 63.161,73.077 63.161,73.936 63.84,74.615 U5.7
NetR7_1: R7.1 U5.5 | length 5.4
  Top Layer w0.381: R7.1 59.305,77.155 U5.5
PhaseA: C7.2 Q3.3 Q6.4 R12.2 U3.6 | length 61.1
  Top Layer w0.5: U3.6 63.84,95.385 63.493,95.038 63.493,95.029 63.2,94.736 C7.2 61.35,94.336 61.031,94.336 60,93.305 v1(60,90.5) 65.481,90.5 65.683,90.298 66.617,90.298 67.433,91.115 67.433,96.683 68.75,98 75,98 77,96 R12.2
  Bottom Layer w0.5: 52.847,73.969 53,74.121 ; v1(60,90.5) 59.981,90.481 59.756,90.481 58.2,88.925 Q3.3 58.2,87.925 60.5,85.625 Q6.4
  Bottom Layer w1: 53,74.121 53,76.75 55.75,79.5 Q6.4
  Bottom Layer w2: 51.75,74 53,74 54.5,74
PhaseB: C9.2 Q1.3 Q2.4 R13.2 U4.6 | length 45.2
  Top Layer w0.5: v1(55,85.5) 55,86.887 56.167,88.054 65.696,88.054 v1(67.5,86.25) ; C9.2 61.8,84.8 62.499,85.499 U4.6 66.749,85.499 v1(67.5,86.25) ; v1(67.5,83.5) v1(67.5,86.25) ; R13.2 73.819,87 72.569,88.25 69,88.25 67.5,86.75 v1(67.5,86.25)
  Bottom Layer w0.5: Q1.3 67.15,86.6 v1(67.5,86.25) ; v1(67.5,83.5) 67.5,81.25 Q2.4
  Bottom Layer w2: 52,85.75 54.75,85.75
PhaseC: C11.2 Q4.4 Q5.3 R14.2 U5.6 | length 74.9
  Top Layer w0.3: 66.602,71.967 67.771,70.798 75.548,70.798 ; v1(75.5,75.25) 75.561,75.25 76.061,74.75 v1(77,74.75) ; v1(77.504,73) 77.504,72.996 78.45,72.05 R14.2
  Top Layer w0.5: v1(56.5,87.25) 56.5,80.946 59.569,77.877 62.453,77.877 62.473,77.857 65.633,77.857 65.912,77.578 65.912,75.993 65.754,75.835 ; C11.2 61.8,75.1 62.585,75.885 U5.6 64.575,75.835 65.754,75.835 ; 66.602,71.967 66.364,72.205 66.364,75.225 65.754,75.835 ; 75.548,70.798 76.75,72 R14.2
  Bottom Layer w0.3: Q4.4@75.5,76.325 Q4.4 ; v1(77,74.75) 77,74.697 77.504,74.193 v1(77.504,73)
  Bottom Layer w0.5: v1@56.446,87.304 v1(56.5,87.25) ; v1(75.5,75.25) Q4.4@75.5,76.325 ; Q5.3 75.95,81.875 Q4.4
  Bottom Layer w1: 53.125,97.25 53.125,90.625 v1@56.446,87.304
  Bottom Layer w2: 51.75,97.75 54.5,97.75
PWM_IN: GND.1 U2.12 | length 19.8
  Top Layer w0.3: U2.12 81.726,85.15 82.449,84.427 82.449,83.801 v1(82.507,83.744)
  Bottom Layer w0.3: v1(82.507,83.744) 82.561,83.69 83.216,83.69 83.406,83.5 85.396,83.5 87.896,81 96.29,81 GND.1
RX: P2.3 U2.30 | length 16.3
  Top Layer w0.3: P2.3 88.727,72.25 91.502,75.025 91.502,84.674 90.226,85.95 U2.30
TX: P2.2 U2.31 | length 16.3
  Top Layer w0.3: U2.31 90.226,86.75 91.954,85.022 91.954,73.164 P2.2
VCC: C6.1 C8.1 C10.1 C12.2 D1.1 D2.1 D3.1 IC1.3 Q1.4 Q3.4 Q5.4 U3.1 U4.1 U5.1 | length 111.2
  Top Layer w0.3: 69.1,81.75 73.424,81.75 73.674,81.5 v1(73.75,81.5) ; C10.1 72.75,74.65 72.238,75.162 72.06,75.162 71.548,75.675 71.548,77.298 v1(73.75,79.5)
  Top Layer w0.5: D3.1 69.184,72.584 69.475,72.584 ; D2.1 69.1,81.75 69.475,82.125 U4.1 69.521,83.004 70.75,83.004 ; U5.1 69.475,72.584 ; U3.1 69.157,92.845 69.107,92.795 69.107,91.757 D1.1 v1(70.5,91) ; v1(71,83.5) 71,83.473 70.75,83.223 70.75,83.004 ; C10.1 72.75,72.25 72.454,71.954 70.105,71.954 69.475,72.584 ; C8.1 72.704,83.004 70.75,83.004 ; C6.1 v1(74.173,93.05)
  Bottom Layer w0.3: v1(73.75,79.5) v1(73.75,81.5)
  Bottom Layer w0.5: v1(70.5,91) 73.5,91 ; v1(71,83.5) 71,85.181 72.902,87.083 72.902,90.402 73.5,91 ; v1(74.173,93.05) Q5.4@76.05,93.05 ; Q5.4 Q5.4@76.05,93.05 ; 73.5,91 74.5,92 75,92 Q5.4@76.05,93.05
  Bottom Layer w0.8: Q5.4 85.75,95.25 88.95,92.05 IC1.3 88.95,89.1 88.2,88.35 C12.2
  Bottom Layer w2: Q3.4 64.078,98.903 95.59,98.903 97.024,97.469 97.653,97.469
x1: C15.2 R1.2 U2.7 X1.1 | length 20.8
  Top Layer w0.381: U2.7 83.292,89.042 83.292,89.826 84.424,90.957 86.76,90.957 88,92.197 R1.2 88.1,93.75 88.843,94.493 88.843,96.658 86.75,98.75 84.5,98.75 84.05,98.3 X1.1
x2: C14.2 R1.1 U2.8 X1.3 | length 13
  Top Layer w0.381: U2.8 82.45,91.45 83,92 C14.2 84.593,92.317 84.593,95.777 84.908,96.093 85.907,96.093 86.441,95.56 86.441,95.25 X1.3@86.45,95.241 ; X1.3 X1.3@86.45,95.241 ; R1.1 86.459,95.25 X1.3@86.45,95.241
pads on no net: U2.11 U2.16 U2.17 U2.19 U2.22 U2.26 U2.27 U2.28

## Polygon pours and split planes (outlines as drawn)
GND on Bottom Layer "GND_L02_P000" (solid, pour order 0): 50,100 100,100 100,70 50,70
GND on Top Layer "GND_L01_P001" (solid, pour order 1): 50,100 100,100 100,70 50,70

## Other copper
Bottom Layer:
  rectangle net VCC: 57,97.75 63.75,99.75
  rectangle net PhaseC: 50.75,96.5 55,99
  rectangle net PhaseB: 50.805,84.313 55,87.25
  rectangle net PhaseA: 50.75,72.5 54.945,75.437
  rectangle net GND: 95.75,71.25 99.75,74
  rectangle net VCC: 95.555,96 99.75,99.75

## Silkscreen, mask and mechanical layers (free items; w line width, h text height)
Top Overlay:
  text "IEEE KOU AUV" at 51.254,90.996 h1.02 r270
  text "5V" at 96.373,85.127 h0.51 r90
  text "PWM" at 96.373,81.877 h0.51 r90
Bottom Overlay:
  text "Phase C" at 54.623,95.377 h0.51
  text "VCC" at 98.996,94.504 h1.02
  text "Phase B" at 54.623,83.377 h0.51
  text "GND" at 98.996,74.254 h1.02
  text "GND" at 84.123,73.377 h0.51
  text "5V" at 86.373,73.377 h0.51
  text "RX" at 88.873,73.377 h0.51
  text "TX" at 91.623,73.377 h0.51
  text "DTR" at 94.373,73.377 h0.51
  text "Phase A" at 54.373,71.377 h0.51
Mechanical 1:
  the board outline again, w0.254